# Altium PCB CLP_007.PcbDoc (part 1 of 2)
Units mm, origin at the board's own origin, x right, y up, seen from the top; angles counter-clockwise.
Board outline 145 x 100 mm, 2 copper layers (Top Layer, Bottom Layer); 159 components, 145 nets, 656 pads, 92 vias.
Unrouted connection lines stored in the file: 86.
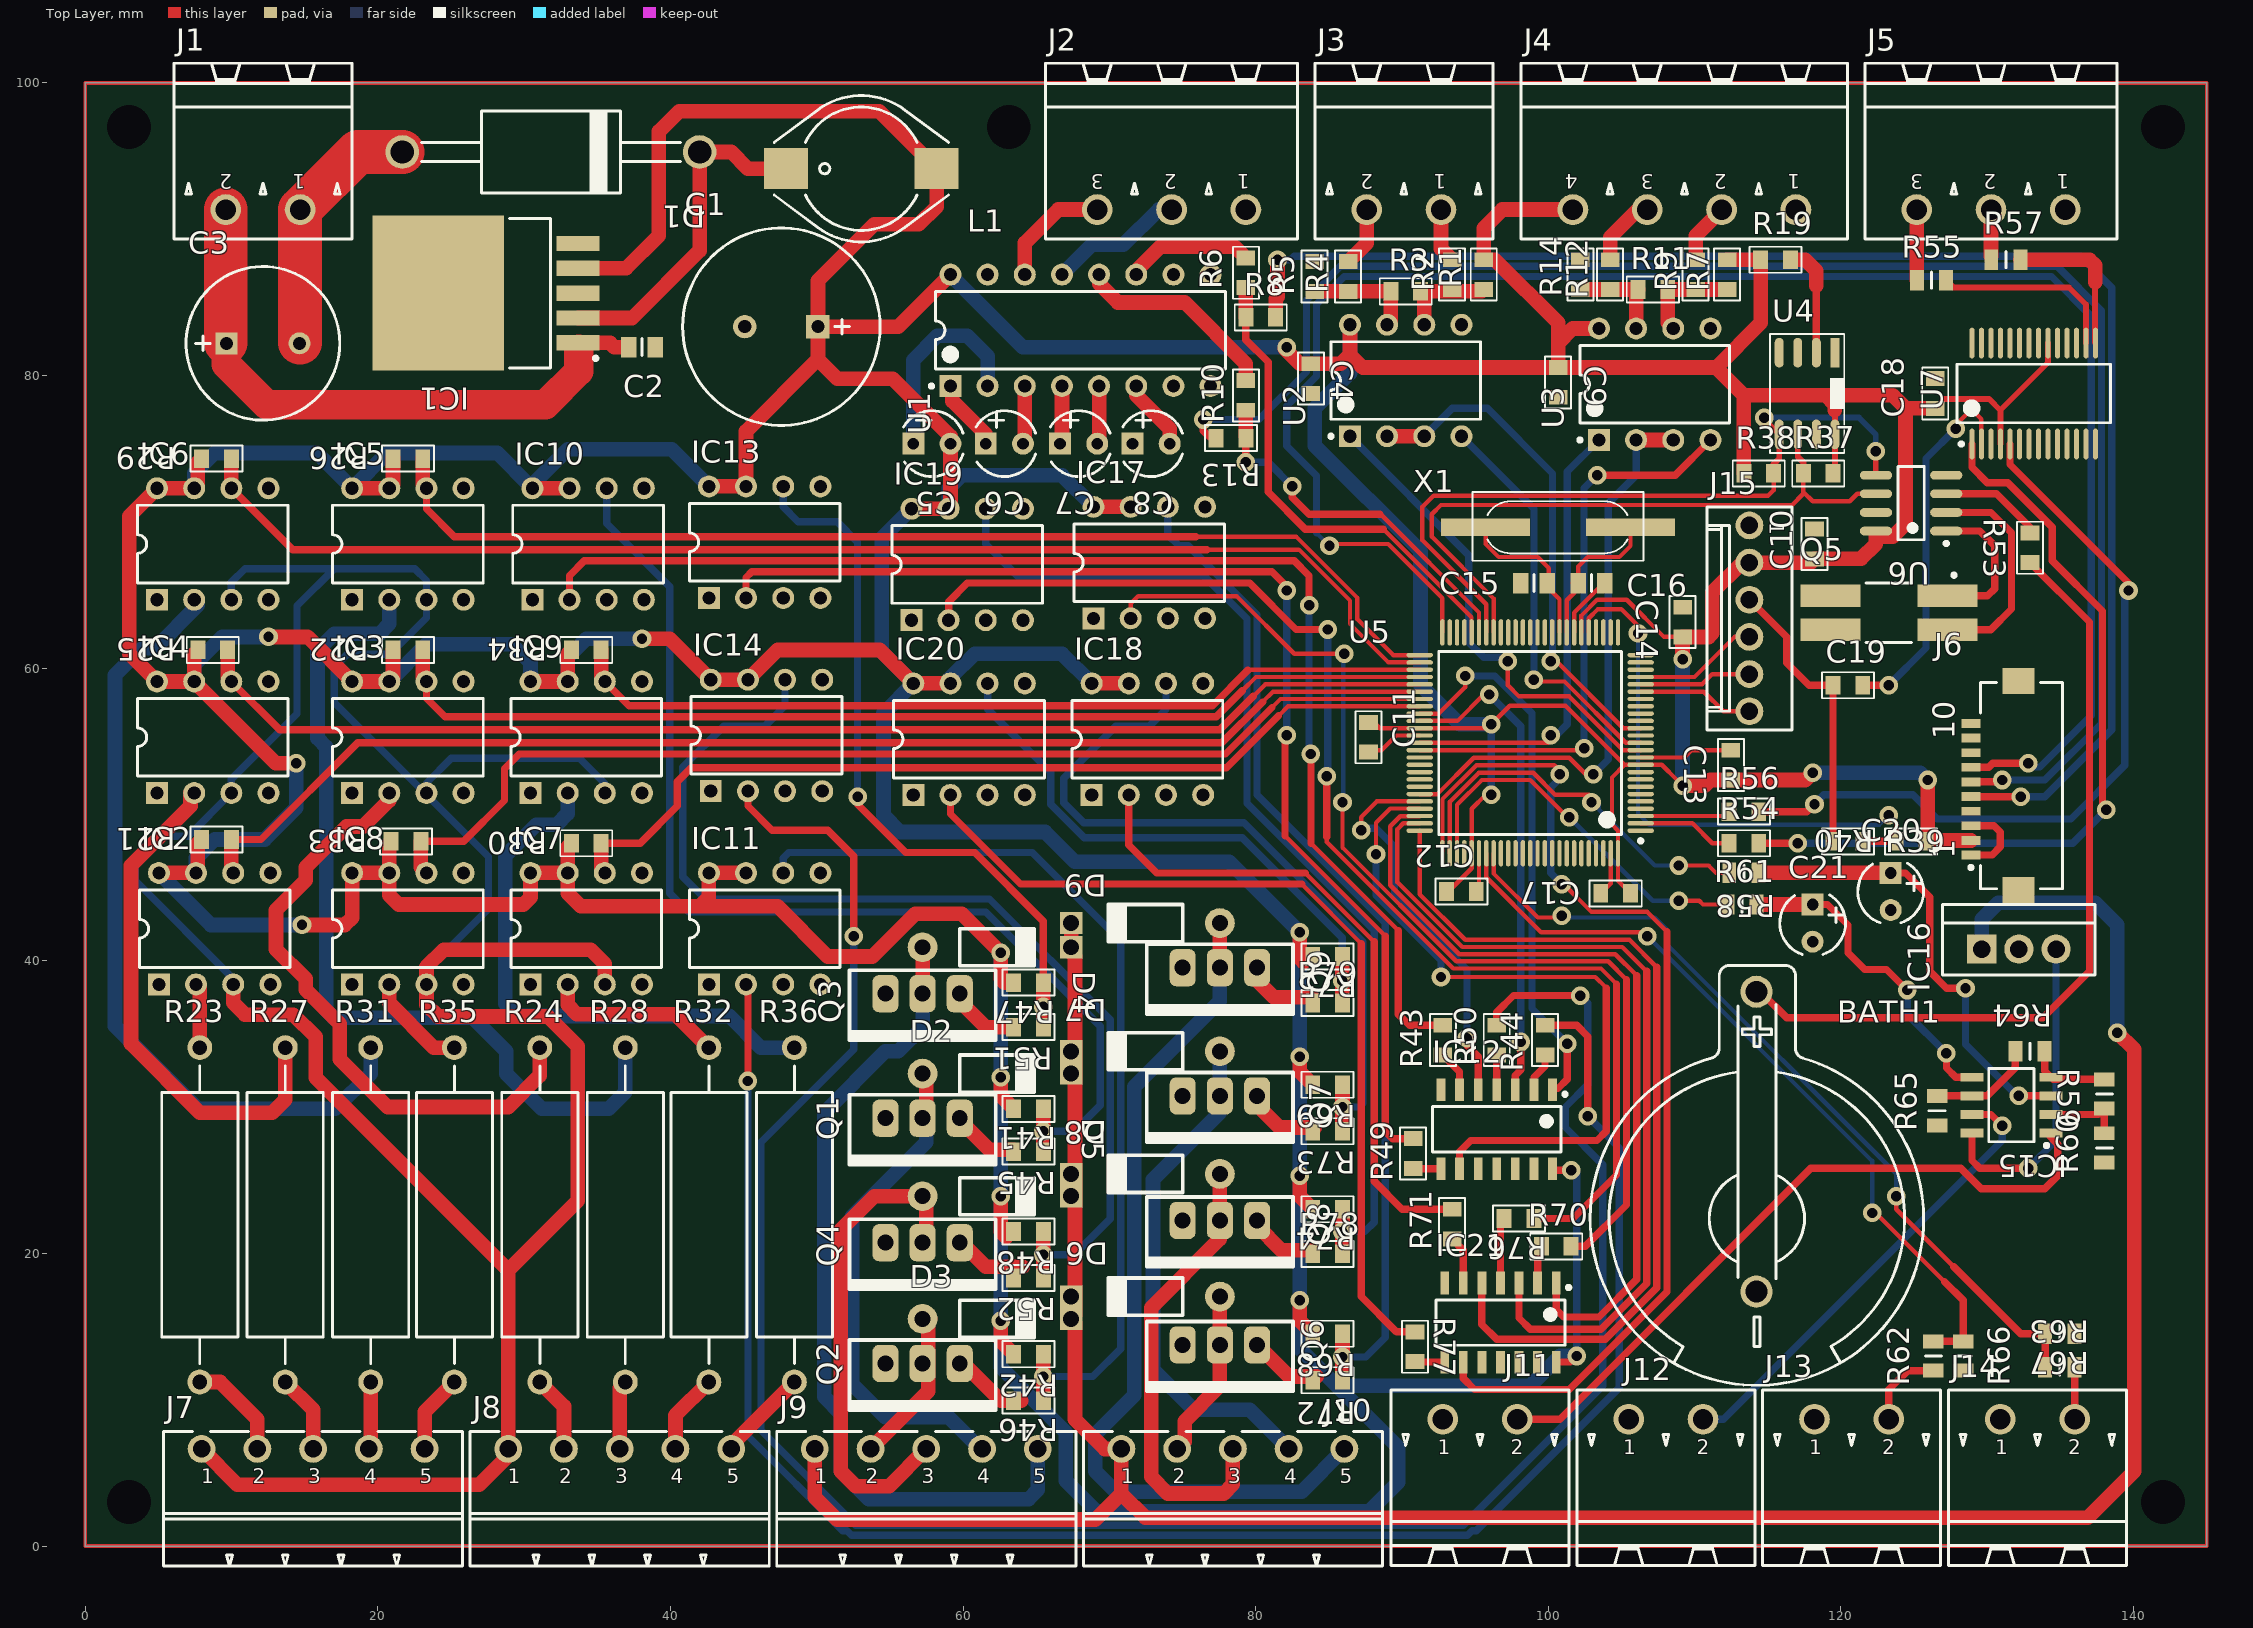
[diagram p0: Top Layer view]
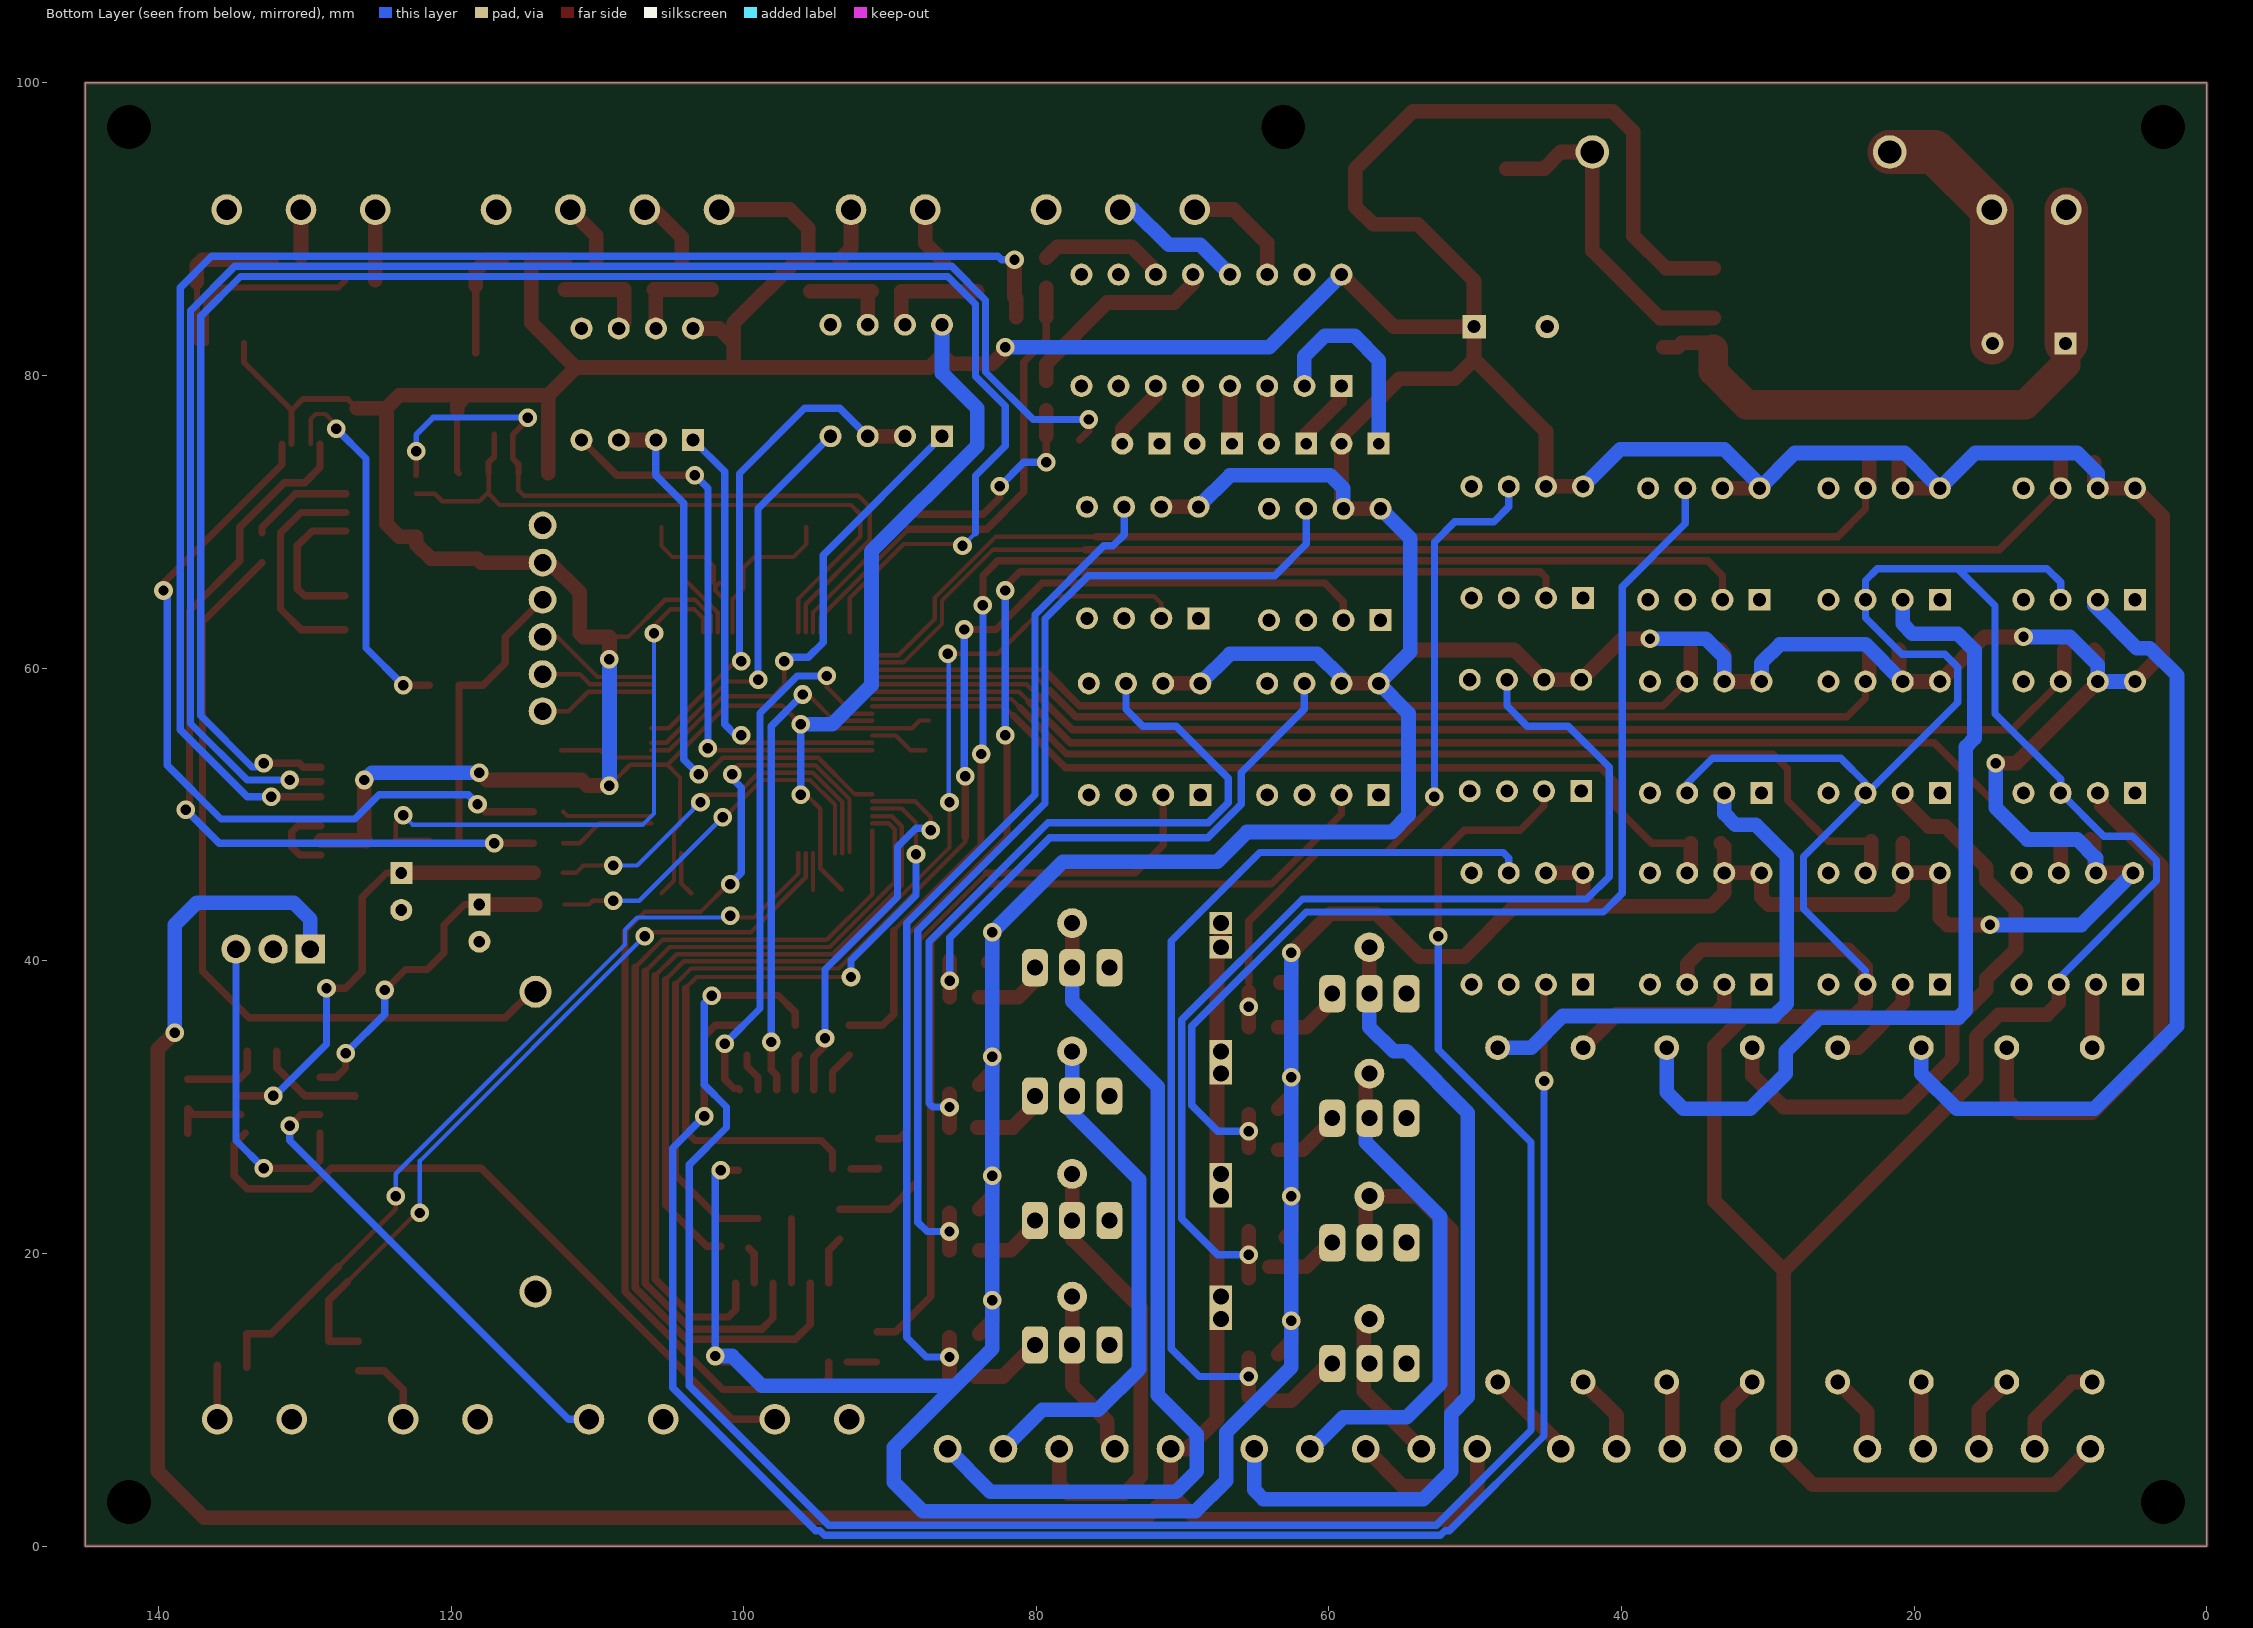
[diagram p1: Bottom Layer view, seen from below]
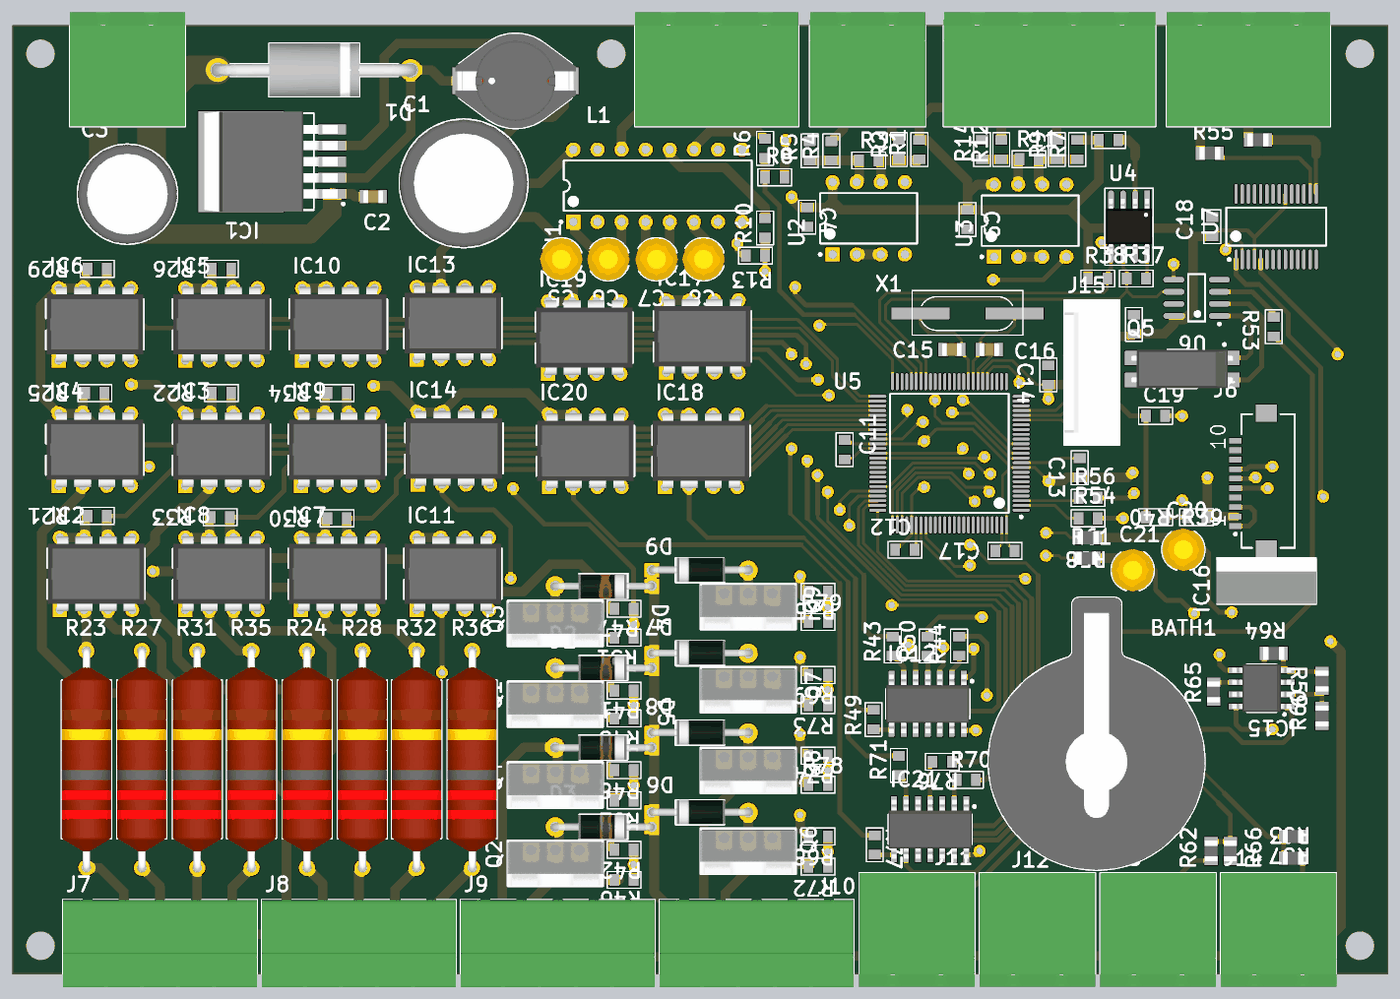
[diagram p3: 3D render of the assembled board from above, using the file's embedded part models]

## Layer stack, top to bottom
Top Layer: signal copper 0.0356
Dielectric: dielectric 0.32, FR-4, Dk 4.8
Bottom Layer: signal copper 0.0356

## Board outline
0,0 145,0 145,100 0,100

## Design rules (kind name [scope] priority, off if disabled: settings)
Clearance [All] p1: gap=0.19
PolygonConnect [All] p1: connectstyle=Relief reliefconductorwidth=0.254 reliefentries=4 polygonreliefangle="90 Angle" airgapwidth=0.254
RoutingVias [All] p1: holewidth=0.711 width=1.27 viastyle="Through Hole" minholewidth=0.711 minwidth=1.27 maxholewidth=0.711 maxwidth=1.27
SilkToSolderMaskClearance SilkscreenOverComponentPads [IsPad] p1: minsilkscreentomaskgap=0.254 clearancetoexposedcopper=TRUE
SolderMaskExpansion [All] p1: expansion=0.102
Width [All] p1: maxlimit=4 minlimit=0.254 preferedwidth=1
27 further rules are at their usual default settings.

## Classes and differential pairs
component class USB_SERIAL: C18 C19 R54 R55 R56 R57 U7
component class RTC_ds1307z: BATH1 C17 Q5 R53 U6
component class Output_dig: D2 D3 D4 D5 IC10 IC11 IC12 IC13 IC14 Q1 Q2 Q3 Q4 R41 R42 R43 R44 R45 R46 R47 R48 R49 R50 R51 R52
component class Output_dig2: D6 D7 D8 D9 IC17 IC18 IC19 IC20 IC21 Q6 Q7 Q8 Q9 R68 R69 R70 R71 R72 R73 R74 R75 R76 R77 R78 R79
component class Microcontrolador: C11 C12 C13 C14 C15 C16 J15 R37 R38 R39 R40 U5 X1
component class Input_dig: IC2 IC3 IC4 IC5 IC6 IC7 IC8 IC9 R21 R22 R23 R24 R25 R26 R27 R28 R29 R30 R31 R32 R33 R34 R35 R36
component class eeprom24c32: C10 R19 U4
component class conn: J1 J2 J3 J4 J5 J6 J7 J8 J9 J10 J11 J12 J13 J14
component class Comu_485: C4 C5 C6 C7 C8 C9 R1 R2 R3 R4 R5 R6 R7 R8 R9 R10 R11 R12 R13 R14 U1 U2 U3
component class analog: C20 C21 IC15 IC16 R58 R59 R60 R61 R62 R63 R64 R65 R66 R67
component class Alimentacao: C1 C2 C3 D1 IC1 L1

## Components (designator, comment, footprint, x,y, rotation, side; value= is the part's Value field where it differs from the comment)
BATH1 "Value" BATH_KEYSTONE_103 114.253,22.385 r270 top
C1 "1000uF" CAPPR500-1350X2200 47.578,83.345 r180 top
C2 "100nF" CAPC2012X135N 38.053,81.948 r180 top
C3 "100uF" CAPPR500-1050X1750 12.145,82.202 r0 top
C4 "100nF" 0805C-TBD 83.773,80.551 r270 top
C5 "1uF" CAPPRB254-450X710 57.865,75.344 r0 top
C6 "1uF" CAPPRB254-450X710 62.818,75.344 r0 top
C7 "1uF" CAPPRB254-450X710 67.898,75.344 r0 top
C8 "1uF" CAPPRB254-450X710 72.851,75.344 r0 top
C9 "100nF" 0805C-TBD 100.664,80.297 r270 top
C10 "100nF" 0805C-TBD 118.19,67.724 r90 top
C11 "100nF" 0805C-TBD 87.71,56.04 r270 top
C12 "100nF" 0805C-TBD 93.298,44.737 r0 top
C13 "100nF" 0805C-TBD 112.475,52.611 r90 top
C14 "100nF" 0805C-TBD 109.173,62.39 r90 top
C15 "22pF" CAPC2012X135N 99.013,65.819 r0 top
C16 "22pF" CAPC2012X135N 102.95,65.819 r180 top
C17 "100nF" 0805C-TBD 105.363,44.61 r180 top
C18 "100nF" 0805C-TBD 126.445,78.011 r90 top
C19 "100nF" 0805C-TBD 121.238,58.834 r180 top
C20 "1uF" CAPPRB254-450X710 123.397,44.737 r270 top
C21 "1uF" CAPPRB254-450X710 118.063,42.578 r270 top
D1 "1N5822" DO-201AD 31.83,95.283 r180 top
D2 "DIODO 1N4007 PF-B1" "DIODO DO41 PF-B1" 67.39,32.291 r270 top
D3 "DIODO 1N4007 PF-B1" "DIODO DO41 PF-B1" 67.39,15.527 r270 top
D4 "DIODO 1N4007 PF-B1" "DIODO DO41 PF-B1" 67.39,40.927 r270 top
D5 "DIODO 1N4007 PF-B1" "DIODO DO41 PF-B1" 67.39,23.909 r270 top
D6 "DIODO 1N4007 PF-B1" "DIODO DO41 PF-B1" 67.39,17.051 r90 top
D7 "DIODO 1N4007 PF-B1" "DIODO DO41 PF-B1" 67.39,33.815 r90 top
D8 "DIODO 1N4007 PF-B1" "DIODO DO41 PF-B1" 67.39,25.433 r90 top
D9 "DIODO 1N4007 PF-B1" "DIODO DO41 PF-B1" 67.39,42.578 r90 top
IC1 "LT1764AEQ-3.3#PBF" TO170P1394X457-6N-R900X1060 27.385,85.631 r180 top
IC2 "HCPL-2601-000E" DIP8-300 8.843,42.197 r90 top
IC3 "HCPL-2601-000E" DIP8-300 22.051,55.278 r90 top
IC4 "HCPL-2601-000E" DIP8-300 8.716,55.278 r90 top
IC5 "HCPL-2601-000E" DIP8-300 22.051,68.486 r90 top
IC6 "HCPL-2601-000E" DIP8-300 8.716,68.486 r90 top
IC7 "HCPL-2601-000E" DIP8-300 34.243,42.197 r90 top
IC8 "HCPL-2601-000E" DIP8-300 22.051,42.197 r90 top
IC9 "HCPL-2601-000E" DIP8-300 34.243,55.278 r90 top
IC10 "HCPL-2601-000E" DIP8-300 34.37,68.486 r90 top
IC11 "HCPL-2601-000E" DIP8-300 46.435,42.197 r90 top
IC12 "SN74LS04D" SOIC127P600X175-14N 96.473,28.481 r270 top
IC13 "HCPL-2601-000E" DIP8-300 46.435,68.613 r90 top
IC14 "HCPL-2601-000E" DIP8-300 46.562,55.405 r90 top
IC15 "LM358AD" SOIC127P600X175-8N 131.652,30.132 r180 top
IC16 "LM7812CT" TO-220-V 132.16,40.8 r0 top
IC17 "HCPL-2601-000E" DIP8-300 72.724,67.216 r90 top
IC18 "HCPL-2601-000E" DIP8-300 72.597,55.151 r90 top
IC19 "HCPL-2601-000E" DIP8-300 60.278,67.089 r90 top
IC20 "HCPL-2601-000E" DIP8-300 60.405,55.151 r90 top
IC21 "SN74LS04D" SOIC127P600X175-14N 96.727,15.273 r270 top
J1 "Family" PHOENIX_1757242 12.145,91.346 r180 top
J2 "Family" PHOENIX_1757255 74.248,91.346 r180 top
J3 "Family" PHOENIX_1757242 90.123,91.346 r180 top
J4 "Family" PHOENIX_1757268 109.3,91.346 r180 top
J5 "Family" PHOENIX_1757255 130.255,91.346 r180 top
J6 "CL586-0541-8" FH12-22(10)SA-1SH 130.509,51.976 r90 top
J7 "Family" PHOENIX_1803303 15.574,6.637 r0 top
J8 "Family" PHOENIX_1803303 36.529,6.637 r0 top
J9 "Family" PHOENIX_1803303 57.484,6.637 r0 top
J10 "Family" PHOENIX_1803303 78.439,6.637 r0 top
J11 "Family" PHOENIX_1757242 95.33,8.669 r0 top
J12 "Family" PHOENIX_1757242 108.03,8.669 r0 top
J13 "Family" PHOENIX_1757242 120.73,8.669 r0 top
J14 "Family" PHOENIX_1757242 133.43,8.669 r0 top
J15 "KK®" MOLEX_22-27-2061 113.745,63.406 r270 top
L1 "100uH" IND_WURTH_WE-PD4_L 53.039,94.14 r0 top
Q1 "TRANSISTOR TIP 122 PF-C2" "TRANSISTOR TO220 PF-C2" 59.77,29.243 r180 top
Q2 "TRANSISTOR TIP 122 PF-C2" "TRANSISTOR TO220 PF-C2" 59.77,12.479 r180 top
Q3 "TRANSISTOR TIP 122 PF-C2" "TRANSISTOR TO220 PF-C2" 59.77,37.752 r180 top
Q4 "TRANSISTOR TIP 122 PF-C2" "TRANSISTOR TO220 PF-C2" 59.77,20.734 r180 top
Q5 "32.768kHz" XTAL_EPSON_MC-406 123.27,63.787 r270 top
Q6 "TRANSISTOR TIP 122 PF-C2" "TRANSISTOR TO220 PF-C2" 80.09,13.749 r180 top
Q7 "TRANSISTOR TIP 122 PF-C2" "TRANSISTOR TO220 PF-C2" 80.09,30.767 r180 top
Q8 "TRANSISTOR TIP 122 PF-C2" "TRANSISTOR TO220 PF-C2" 80.09,22.258 r180 top
Q9 "TRANSISTOR TIP 122 PF-C2" "TRANSISTOR TO220 PF-C2" 80.09,39.53 r180 top
R1 "4K7" 0805R-4K7 95.584,87.663 r270 top
R2 "56" 0805R-56 93.425,86.139 r90 top
R3 "4K7" 0805R-4K7 91.012,85.758 r180 top
R4 "56" 0805R-56 86.313,86.012 r90 top
R5 "4K7" 0805R-4K7 84.027,86.012 r90 top
R6 "56" 0805R-56 79.328,86.266 r90 top
R7 "4K7" 0805R-4K7 112.221,87.663 r270 top
R8 "56" 0805R-56 79.582,83.98 r0 top
R9 "56" 0805R-56 110.062,86.139 r90 top
R10 "56" 0805R-56 79.328,77.884 r90 top
R11 "4K7" 0805R-4K7 107.903,85.885 r180 top
R12 "56" 0805R-56 104.22,86.139 r90 top
R13 "56" 0805R-56 79.074,75.725 r180 top
R14 "4K7" 0805R-4K7 102.188,86.139 r90 top
R19 "0R" 0805R-GENERIC 116.285,87.917 r180 top
R21 "330R" 0805R-330 7.954,48.293 r0 top
R22 "330R" 0805R-330 21.035,61.247 r0 top
R23 "4k7" RES2286-1670X520 7.827,22.639 r90 top
R24 "4k7" RES2286-1670X520 31.068,22.639 r90 top
R25 "330R" 0805R-330 7.7,61.247 r0 top
R26 "330R" 0805R-330 21.035,74.328 r0 top
R27 "4k7" RES2286-1670X520 13.669,22.639 r90 top
R28 "4k7" RES2286-1670X520 36.91,22.639 r90 top
R29 "330R" 0805R-330 7.954,74.328 r0 top
R30 "330R" 0805R-330 33.227,48.039 r0 top
R31 "4k7" RES2286-1670X520 19.511,22.639 r90 top
R32 "4k7" RES2286-1670X520 42.625,22.639 r90 top
R33 "330R" 0805R-330 20.908,48.166 r0 top
R34 "330R" 0805R-330 33.227,61.247 r0 top
R35 "4k7" RES2286-1670X520 25.226,22.639 r90 top
R36 "4k7" RES2286-1670X520 48.467,22.639 r90 top
R37 "1K5" 0805R-1K5 119.206,73.312 r180 top
R38 "1K5" 0805R-1K5 113.618,73.312 r0 top
R39 "1K" 0805R-1K 119.714,48.166 r0 top
R40 "10K" 0805R-10K 125.81,48.166 r180 top
R41 "330R" 0805R-330 63.453,29.878 r0 top
R42 "330R" 0805R-330 63.453,13.114 r0 top
R43 "10K" 0805R-10K 92.79,33.561 r90 top
R44 "10K" 0805R-10K 99.775,33.561 r90 top
R45 "10K" 0805R-10K 65.485,26.957 r180 top
R46 "10K" 0805R-10K 65.485,9.939 r180 top
R47 "330R" 0805R-330 63.453,38.514 r0 top
R48 "330R" 0805R-330 63.453,21.496 r0 top
R49 "10K" 0805R-10K 90.758,25.814 r90 top
R50 "10K" 0805R-10K 96.473,33.561 r90 top
R51 "10K" 0805R-10K 65.485,35.466 r180 top
R52 "10K" 0805R-10K 65.485,18.321 r180 top
R53 "0R" 0805R-GENERIC 132.922,67.47 r90 top
R54 "1K" 0805R-1K 114.126,48.039 r180 top
R55 "22" RESC2012X60N 126.191,86.52 r0 top
R56 "1K" 0805R-1K 114.126,50.198 r180 top
R57 "22" RESC2012X60N 131.271,87.917 r0 top
R58 "4k7" RESC2012X60N 113.364,46.007 r0 top
R59 "1k" RESC2012X60N 138.002,30.894 r90 top
R60 "1k" RESC2012X60N 138.002,27.211 r90 top
R61 "4k7" RESC2012X60N 113.237,43.848 r0 top
R62 "10k" RESC2012X60N 126.318,12.987 r270 top
R63 "10k" RESC2012X60N 134.954,12.225 r0 top
R64 "1k" RESC2012X60N 132.922,33.815 r0 top
R65 "1k" RESC2012X60N 126.572,29.751 r90 top
R66 "10k" RESC2012X60N 128.35,12.987 r90 top
R67 "10k" RESC2012X60N 134.954,14.511 r180 top
R68 "330R" 0805R-330 83.9,14.511 r0 top
R69 "330R" 0805R-330 83.9,31.529 r0 top
R70 "10K" 0805R-10K 99.521,20.48 r0 top
R71 "10K" 0805R-10K 93.425,20.988 r90 top
R72 "10K" 0805R-10K 85.932,11.336 r180 top
R73 "10K" 0805R-10K 85.932,28.354 r180 top
R74 "330R" 0805R-330 83.9,23.02 r0 top
R75 "330R" 0805R-330 83.9,40.292 r0 top
R76 "10K" 0805R-10K 96.981,22.385 r0 top
R77 "10K" 0805R-10K 90.885,12.606 r90 top
R78 "10K" 0805R-10K 85.932,19.972 r180 top
R79 "10K" 0805R-10K 85.932,37.117 r180 top
U1 "MAX232ACPE" PE16A 68.025,83.091 r90 top
U2 "SN65HVD20P" P8 90.25,79.662 r90 top
U3 "SN65HVD20P" P8 107.268,79.408 r90 top
U4 "24C32" SO8 119.587,81.567 r270 top
U5 "ATmega2560-16AU" 100A_N 98.759,54.897 r180 top
U6 "DS1307Z" S8-2_N 124.794,71.28 r180 top
U7 "FT232RL-Reel" SSOP-28_N 133.176,78.773 r90 top
X1 "16MC" XTAL-RU49/4 95.711,69.629 r0 top

## Footprints (in the part's own frame and the unit in brackets; to place one, negate y for a bottom-side part, rotate by r counter-clockwise, add the part's x,y. Pads: shape width x height; smd on the part's side, far side on the other; paste and mask are expansions set on the pad)
100A_N [mm] "Thin QFP, 100-Leads, Body 14x14mm, Pitch 0.5mm, IPC Medium Density"
  oval 1.8x0.3 smd: 1(-7.55,6) 2(-7.55,5.5) 3(-7.55,5) 4(-7.55,4.5) 5(-7.55,4) 6(-7.55,3.5) 7(-7.55,3) 8(-7.55,2.5) 9(-7.55,2) 10(-7.55,1.5) 11(-7.55,1) 12(-7.55,0.5) 13(-7.55,0) 14(-7.55,-0.5) 15(-7.55,-1) 16(-7.55,-1.5) 17(-7.55,-2) 18(-7.55,-2.5) 19(-7.55,-3) 20(-7.55,-3.5) 21(-7.55,-4) 22(-7.55,-4.5) 23(-7.55,-5) 24(-7.55,-5.5) 25(-7.55,-6) 51(7.55,-6) 52(7.55,-5.5) 53(7.55,-5) 54(7.55,-4.5) 55(7.55,-4) 56(7.55,-3.5) 57(7.55,-3) 58(7.55,-2.5) 59(7.55,-2) 60(7.55,-1.5) 61(7.55,-1) 62(7.55,-0.5) 63(7.55,0) 64(7.55,0.5) 65(7.55,1) 66(7.55,1.5) 67(7.55,2) 68(7.55,2.5) 69(7.55,3) 70(7.55,3.5) 71(7.55,4) 72(7.55,4.5) 73(7.55,5) 74(7.55,5.5) 75(7.55,6)
  oval 0.3x1.8 smd: 26(-6,-7.55) 27(-5.5,-7.55) 28(-5,-7.55) 29(-4.5,-7.55) 30(-4,-7.55) 31(-3.5,-7.55) 32(-3,-7.55) 33(-2.5,-7.55) 34(-2,-7.55) 35(-1.5,-7.55) 36(-1,-7.55) 37(-0.5,-7.55) 38(0,-7.55) 39(0.5,-7.55) 40(1,-7.55) 41(1.5,-7.55) 42(2,-7.55) 43(2.5,-7.55) 44(3,-7.55) 45(3.5,-7.55) 46(4,-7.55) 47(4.5,-7.55) 48(5,-7.55) 49(5.5,-7.55) 50(6,-7.55) 76(6,7.55) 77(5.5,7.55) 78(5,7.55) 79(4.5,7.55) 80(4,7.55) 81(3.5,7.55) 82(3,7.55) 83(2.5,7.55) 84(2,7.55) 85(1.5,7.55) 86(1,7.55) 87(0.5,7.55) 88(0,7.55) 89(-0.5,7.55) 90(-1,7.55) 91(-1.5,7.55) 92(-2,7.55) 93(-2.5,7.55) 94(-3,7.55) 95(-3.5,7.55) 96(-4,7.55) 97(-4.5,7.55) 98(-5,7.55) 99(-5.5,7.55) 100(-6,7.55)
  silkscreen extent -7.68,-6.25 6.25,6.82, body extent -7,-7 7,7, height 1.2
0805C-TBD [mil] "CAPACITOR 0805"
  rect 40x50 smd: 1(-10,0) 2(70,0)
  silkscreen extent -40,-35 100,35, body extent -11,-25 70,25, height 26
0805R-1K [mil] "RESISTOR 0805"
  rect 40x50 smd: 1(-10,0) 2(70,0)
  silkscreen extent -40,-35 100,35, body extent -11,-25 70,25, height 27
0805R-1K5 [mil] "RESISTOR 0805"
  rect 40x50 smd: 1(-10,0) 2(70,0)
  silkscreen extent -40,-35 100,35, body extent -11,-25 70,25, height 27
0805R-4K7 [mil] "RESISTOR 0805"
  rect 40x50 smd: 1(-10,0) 2(70,0)
  silkscreen extent -40,-35 100,35, body extent -11,-25 70,25, height 27
0805R-10K [mil] "RESISTOR 0805"
  rect 40x50 smd: 1(0,0) 2(80,0)
  silkscreen extent -30,-35 110,35, body extent -1,-25 80,25, height 27
0805R-56 [mil] "RESISTOR 0805"
  rect 40x50 smd: 1(-10,0) 2(70,0)
  silkscreen extent -40,-35 100,35, body extent -11,-25 70,25, height 27
0805R-330 [mil] "RESISTOR 0805"
  rect 40x50 smd: 1(0,0) 2(80,0)
  silkscreen extent -30,-35 110,35, body extent -1,-25 80,25, height 27
0805R-GENERIC [mil] "RESISTOR 0805"
  rect 40x50 smd: 1(-10,0) 2(70,0)
  silkscreen extent -40,-35 100,35, body extent -11,-25 70,25, height 27
BATH_KEYSTONE_103 [mm] "Battery Holder for 20mm Lithium Coin Cells"
  round 2.2 hole 1.5: 1(-15.5,-0.031) 2(5,-0.031)
  silkscreen extent -17.3,-11.4 11.4,11.4, body extent -17.3,-11.39 11.4,11.39, height 8.5
CAPC2012X135N [mm] "Chip Capacitor, Body 2.0x1.25mm, IPC Medium Density"
  rect 1.05x1.4 smd: 1(-0.9,0) 2(0.9,0)
  silkscreen extent 0,-0.58 0,0.58, body extent -1.05,-0.67 1.05,0.68, height 1.25
CAPPR500-1050X1750 [mm] "Capacitor, Radial, Pin spacing 5.0mm - Body Diameter 10.5mm X Body Height 17.5mm"
  rect 1.5x1.5 hole 0.9: 1(-2.5,0)
  round 1.5 hole 0.9: 2(2.5,0)
  silkscreen extent -5.25,-5.25 5.25,5.25, body extent -5.25,-5.23 5.25,5.23, height 17.5
CAPPR500-1350X2200 [mm] "Capacitor, Radial, Pin spacing 5.0mm - Body Diameter 13.5mm X Body Height 22.0mm"
  rect 1.6x1.6 hole 0.9: 1(-2.5,0)
  round 1.6 hole 0.9: 2(2.5,0)
  silkscreen extent -6.75,-6.75 6.75,6.75, body extent -6.75,-6.75 6.75,6.75, height 22.5
CAPPRB254-450X710 [mm] "Capacitor, Polarized Radial Bead, Pin spacing 2.54mm - Body Diameter 4.5mm X Body Height 7.1mm"
  rect 1.5x1.5 hole 0.8: 1(-1.27,0)
  round 1.5 hole 0.8: 2(1.27,0)
  silkscreen extent -1.93,-2.25 2.13,2.25, body extent -2.25,-2.25 2.25,2.25, height 7.08
"DIODO DO41 PF-B1" [mil]
  rect 60x60 hole 43: 1(0,0)
  round 80 hole 43: 2(0,-400)
  silkscreen extent -50,-300 50,-100, body extent -49,-419 52,11, height 104
DIP8-300 [mm] "DIP 8 Leads, Row Spacing 7.62 mm; Pitch 2.54 mm"
  rect 1.5x1.5 hole 0.9: 1(-3.81,3.81)
  round 1.5 hole 0.9: 2(-3.81,1.27) 3(-3.81,-1.27) 4(-3.81,-3.81) 5(3.81,-3.81) 6(3.81,-1.27) 7(3.81,1.27) 8(3.81,3.81)
  silkscreen extent -2.65,-5.15 2.65,5.15, body extent -3.93,-5.08 3.94,5.08, height 5.33
DO-201AD [mm] "DO-201AD, Diode, Axial; Lead Spacing 20.32mm, Lead Dia. 1.3mm, Body Length 9.5mm, Body Dia. 5.6mm"
  round 2.3 hole 1.6: 1(-10.16,0) 2(10.16,0)
  silkscreen extent -8.85,-2.8 8.85,2.8, body extent -10.81,-2.8 10.81,2.8, height 5.6
FH12-22(10)SA-1SH [mm] "Connector; FH12 Series; 10 Position; 1.0mm Spaced Bottom Eccentric Contact"
  rect 0.6x1.3 smd: 1(-4.75,1.625) 2(-3.75,1.625) 3(-2.75,1.625) 4(-1.75,1.625) 5(-0.75,1.625) 6(0.25,1.625) 7(1.25,1.625) 8(2.25,1.625) 9(3.25,1.625) 10(4.25,1.625)
  rect 1.8x2.2 smd: 11(7.15,-1.625) 12(-7.15,-1.625)
  silkscreen extent -7.05,-4.62 7.05,1.75
IND_WURTH_WE-PD4_L [mm] "SMD Power Choke, Width 10mm Body Lenght 12.7mm Height 5.3mm, WURTH WE-PD 4 Serie Type L"
  rect 3x2.8 smd: 1(-5.15,0) 2(5.15,0)
  silkscreen extent -5.95,-5 5.95,5, body extent -6.35,-4.99 6.35,4.99, height 5
MOLEX_22-27-2061 [mm] "2.54mm (.100\") Pitch KK® Header, Single Row, Vertical, 6 Circuits"
  round 1.9 hole 1.2: 1(-6.35,0) 2(-3.81,0) 3(-1.27,0) 4(1.27,0) 5(3.81,0) 6(6.35,0)
  silkscreen extent -7.62,-2.9 7.62,2.9, body extent -7.62,-2.9 7.62,2.9, height 11.7
P8 [mm] "DIP, 8-Leads, Row Spacing 7.62mm, Pitch 2.54mm, Body 9.6x6.4mm"
  rect 1.5x1.5 hole 0.9: 1(-3.81,3.81)
  round 1.5 hole 0.9: 2(-3.81,1.27) 3(-3.81,-1.27) 4(-3.81,-3.81) 5(3.81,-3.81) 6(3.81,-1.27) 7(3.81,1.27) 8(3.81,3.81)
  silkscreen extent -3.93,-5.1 2.65,5.23, body extent -3.3,-5.07 3.3,5.07, height 5.08
PE16A [mm] "DIP, 16-Leads, Row Spacing 7.62mm, Pitch 2.54mm, Body 19.18x6.99mm"
  rect 1.5x1.5 hole 0.9: 1(-3.81,8.89)
  round 1.5 hole 0.9: 2(-3.81,6.35) 3(-3.81,3.81) 4(-3.81,1.27) 5(-3.81,-1.27) 6(-3.81,-3.81) 7(-3.81,-6.35) 8(-3.81,-8.89) 9(3.81,-8.89) 10(3.81,-6.35) 11(3.81,-3.81) 12(3.81,-1.27) 13(3.81,1.27) 14(3.81,3.81) 15(3.81,6.35) 16(3.81,8.89)
  silkscreen extent -3.93,-9.9 2.65,10.31, body extent -3.3,-9.9 3.3,9.9, height 5.08
PHOENIX_1757242 [mm] "PHOENIX MSTBA Serie, Pitch 5.08mm, 12A, 250V, 2 Positions Header"
  round 2.1 hole 1.4: 1(-2.54,0) 2(2.54,0)
  silkscreen extent -6.08,-10 6.08,2, body extent -6.08,-10 6.08,2, height 8.6
PHOENIX_1757255 [mm] "PHOENIX MSTBA Serie, Pitch 5.08mm, 12A, 250V, 3 Positions Header"
  round 2.1 hole 1.4: 1(-5.08,0) 2(0,0) 3(5.08,0)
  silkscreen extent -8.62,-10 8.62,2, body extent -8.62,-10 8.62,2, height 8.6
PHOENIX_1757268 [mm] "PHOENIX MSTBA Serie, Pitch 5.08mm, 12A, 250V, 4 Positions Header"
  round 2.1 hole 1.4: 1(-7.62,0) 2(-2.54,0) 3(2.54,0) 4(7.62,0)
  silkscreen extent -11.16,-10 11.16,2, body extent -11.16,-10 11.16,2, height 8.6
PHOENIX_1803303 [mm] "PHOENIX MC Serie, Pitch 3.81mm, 8A, 160V, 5 Positions Right Angled Header"
  round 1.9 hole 1.2: 1(-7.62,0) 2(-3.81,0) 3(0,0) 4(3.81,0) 5(7.62,0)
  silkscreen extent -10.22,-8 10.22,1.2, body extent -10.22,-8 10.22,1.3, height 7.25
RES2286-1670X520 [mm] "Resistor, Axial, Pad spacing 22.22 mm - Body Lengh 16.7mm X Body Diameter 5.2mm"
  round 1.7 hole 1: 1(-11.43,0) 2(11.43,0)
  silkscreen extent -10.16,-2.6 10.16,2.6, body extent -11.82,-2.6 11.82,2.6, height 5.2
RESC2012X60N [mm] "Chip Resistor, EIA 0805, Metric 2012, Body 2.0x1.2mm, IPC Medium Density"
  rect 0.95x1.4 smd: 1(-1,0) 2(1,0)
  silkscreen extent 0,-0.55 0,0.55, body extent -1.1,-0.67 1.1,0.68, height 0.6
S8-2_N [mm] "SOIC, 8-Leads, Body 4.9x3.9mm, Pitch 1.27mm, IPC Medium Density"
  oval 2.2x0.6 smd: 1(-2.4,1.905) 2(-2.4,0.635) 3(-2.4,-0.635) 4(-2.4,-1.905) 5(2.4,-1.905) 6(2.4,-0.635) 7(2.4,0.635) 8(2.4,1.905)
  silkscreen extent -2.53,-2.5 0.9,2.88, body extent -2,-2.5 2,2.5, height 1.75
SO8 [mil]
  rect 80x24 smd: 1(0,0)
  oval 80x24 smd: 2(0,-50) 3(0,-100) 4(0,-150) 5(220,-150) 6(220,-100) 7(220,-50) 8(220,0)
  silkscreen extent -50,-175 270,25, body extent -5,-171 222,22, height 57
SOIC127P600X175-8N [mm] "SOIC 8, Pitch 1.27mm - Body 4x5mm, IPC Medium Density"
  rect 1.55x0.6 smd: 1(-2.7,1.905) 2(-2.7,0.635) 3(-2.7,-0.635) 4(-2.7,-1.905) 5(2.7,-1.905) 6(2.7,-0.635) 7(2.7,0.635) 8(2.7,1.905)
  silkscreen extent -2.53,-2.5 1.55,2.88, body extent -3.1,-2.5 3.1,2.5, height 1.75
SOIC127P600X175-14N [mm] "SOIC 14, Pitch 1.27mm - Body 4x8.75mm, IPC Medium Density"
  rect 1.55x0.6 smd: 1(-2.7,3.81) 2(-2.7,2.54) 3(-2.7,1.27) 4(-2.7,0) 5(-2.7,-1.27) 6(-2.7,-2.54) 7(-2.7,-3.81) 8(2.7,-3.81) 9(2.7,-2.54) 10(2.7,-1.27) 11(2.7,0) 12(2.7,1.27) 13(2.7,2.54) 14(2.7,3.81)
  silkscreen extent -2.52,-4.4 1.55,4.79, body extent -3.1,-4.37 3.1,4.38, height 1.75
SSOP-28_N [mm] "SOP, 28-Leads, Body 10.2x5.3mm, Pitch 0.65mm, IPC Medium Density"
  oval 2.1x0.35 smd: 1(-3.45,4.225) 2(-3.45,3.575) 3(-3.45,2.925) 4(-3.45,2.275) 5(-3.45,1.625) 6(-3.45,0.975) 7(-3.45,0.325) 8(-3.45,-0.325) 9(-3.45,-0.975) 10(-3.45,-1.625) 11(-3.45,-2.275) 12(-3.45,-2.925) 13(-3.45,-3.575) 14(-3.45,-4.225) 15(3.45,-4.225) 16(3.45,-3.575) 17(3.45,-2.925) 18(3.45,-2.275) 19(3.45,-1.625) 20(3.45,-0.975) 21(3.45,-0.325) 22(3.45,0.325) 23(3.45,0.975) 24(3.45,1.625) 25(3.45,2.275) 26(3.45,2.925) 27(3.45,3.575) 28(3.45,4.225)
  silkscreen extent -3.57,-5.25 2,5.25, body extent -2.8,-5.25 2.8,5.25, height 2
TO170P1394X457-6N-R900X1060 [mm] "TO, 1.70mm Pitch; 5 Pin, 13.945mm L X 8.89mm W X 4.572mm H body, IPC Medium Density"
  rect 2.95x1.05 smd: 1(-6.3,3.4) 2(-6.3,1.7) 3(-6.3,0) 4(-6.3,-1.7) 5(-6.3,-3.4)
  rect 9x10.6 smd: 6(3.25,0)
  silkscreen extent -7.63,-5.1 -1.6,5.1, body extent -6.93,-5.27 7.11,5.27, height 4.63
TO-220-V [mm] "TO-220 3-Terminal - Vertical Mount"
  rect 2x2 hole 1.2: 1(-2.54,0)
  round 2 hole 1.2: 2(0,0) 3(2.54,0)
  silkscreen extent -5.21,-1.78 5.21,3.05, body extent -5.27,-1.75 5.27,2.95, height 20.5
"TRANSISTOR TO220 PF-C2" [mil]
  rrect50% 70x100 hole 43: 1(0,0) 2(100,0) 3(200,0)
  silkscreen extent -100,-63 300,125, body extent -100,-55 300,125, height 726
XTAL-RU49/4 [mil]
  rect 240x47.24 smd: 1(0,0) 2(390,0)
  silkscreen extent -35,-90 425,95, body extent -78,-90 468,95, height 120
XTAL_EPSON_MC-406 [mm] "EPSON Crystal; 10.41mm L X 4.06mm W X 3.6mm H"
  rect 1.52x4.1 smd: 1(-1.16,4) 2(-1.16,-4) 3(1.16,-4) 4(1.16,4)
  silkscreen extent -2.7,-1.55 2.03,4.58, body extent -2.03,-5.4 2.03,5.41, height 3.6

## Part data
BATH1: library part BATH_KEYSTONE_103, "Battery Holder whit 2 Pin"
C1: library part CAER_1000UF_35V_20%_VISHAY_MAL203850102E3, "Polarised capacitor"
C2: library part CC0805_100NF_50V_10%_X7R, "Non-polarised capacitor"
C3: library part CAER_100UF_63V_20%_500-1050X1750_LESR0R190, "Polarised capacitor"
C4 C9 C10 C11 C12 C13 C14 C17 C18 C19: library part 0805C-100nF-25V-X7R-MUR, "CAPACITOR 0805 CERAMIC"
C5 C6 C7 C8 C20 C21: library part CTEB_1UF_35V_10%_254-450X710, "Polarised capacitor"
C15 C16: library part CC0805_22PF_50V_5%_NP0, "Non-polarised capacitor"
D1: "Schottky Diode"
IC1: "3A, Fast Transient Response, Low Noise, LDO Regulators"
IC2 IC3 IC4 IC5 IC6 IC7 IC8 IC9 IC10 IC11 IC13 IC14 IC17 IC18 IC19 IC20: "Single Optocoupler"
IC12 IC21: "Hex Inverter"
IC15: "Dual Operational Amplifier"
IC16: library part LM7812CT_v, "3-Terminal Regulator 1=IN 2=GND 3=OUT"
J1 J3 J11 J12 J13 J14: library part PHOENIX_1757242, "Connector 2 Male"
J2 J5: library part PHOENIX_1757255, "Connector 3 Male"
J4: library part PHOENIX_1757268, "Connector 4 Male"
J6: "FH12 Series, \"Flip-Lock\" SMT/ZIF FFC/FPC Connector - 1.0mm Spaced Bottom Eccentric Contact"
J7 J8 J9 J10: library part PHOENIX_1803303, "Connector 5 Male"
J15: library part MOLEX_22-27-2061, "Connector 6 Male"
L1: library part IND_3.3UH_20%_WURTH_WE-PD4_74456033, "Inductor With Magnetic core"
Q5: library part "XTAL_32.768KHZ_EPSON_MC-406 32.768K-A3:ROHS", "Crystal 4 pins 1=XTAL Control 2 And 3=NC 4=XTAL"
R1 R3 R5 R7 R11 R14: library part 0805R-4K7, "RESISTOR 0805 1/4 WATT THIN FILM"
R2 R4 R6 R8 R9 R10 R12 R13: library part 0805R-56, "RESISTOR 0805 1/4 WATT THIN FILM"
R19 R53: library part 0805R-0R, "RESISTOR 0805 1 WATT"
R21 R22 R25 R26 R29 R30 R33 R34 R41 R42 R47 R48 R68 R69 R74 R75: library part 0805R-330, "RESISTOR 0805 1/4 WATT THIN FILM"
R23 R24 R27 R28 R31 R32 R35 R36: library part RMF_4K7_5%_3W_250PPM_2286-1670X520, "Resistor - 5%"
R37 R38: library part 0805R-1K5, "RESISTOR 0805 1/4 WATT THIN FILM"
R39 R54 R56: library part 0805R-1K, "RESISTOR 0805 1/4 WATT THIN FILM"
R40 R43 R44 R45 R46 R49 R50 R51 R52 R70 R71 R72 R73 R76 R77 R78 R79: library part 0805R-10K, "RESISTOR 0805 1/4 WATT THIN FILM"
R55 R57: library part R0805_22R_1%_0.125W_100PPM, "Resistor - 1%"
R58 R61: library part R0805_4K7_1%_0.125W_100PPM, "Resistor - 1%"
R59 R60 R64 R65: library part R0805_1K_1%_0.33W_100PPM_VISHAY_CRCW-HP, "Resistor - 1%"
R62 R63 R66 R67: library part R0805_10K_0.1%_0.1W_10PPM, "Resistor - 0.1%"
U1: "+5V Powered, Multi-Channel RS-232 Driver/Receiver"
U2 U3: "Extended Common-mode RS-485 Transceiver, 25 Mbps, 5 V, Half Duplex, -40 to 85 degC, 8-pin PDIP (P), Pb-Free (RoHS)"
U4: "I2C EEPROM 4K X 8"
U5: "8-bit AVR Microcontroller, 4.5-5.5V, 16MHz, 256KB Flash, 4KB EEPROM, 8KB SRAM, 86 GPIO pins, 100-pin TQFP, Industrial Grade (-40°C to 85°C), Pb-Free"
U6: "64 x 8, Serial, I2C Real-Time Clock, 5.0V, 8-Pin SO, 0 to 70 degC"
U7: "USB UART Asynchronous Serial Data Transfer Chip, 28-pin SSOP, Tape and Reel"
X1: library part 16MC-HC49US, "16MHZ CRSYTAL HC49US"

## Free pads (board coordinates)
  round 1.524 hole 3: 0(3,3) 0(3,97) 0(63.119,97) 0(142,3) 0(142,97)

## Via types
v1: diameter 1.27, hole 0.711, Top Layer to Bottom Layer, 92 vias

## Nets (pads, with @x,y where several pads share a name; then routed paths per layer and width w, separated by ;. In a path a pad name is that pad's centre, name@x,y a point inside that pad or via, vN(x,y) a via of type N, cw(c..) or ccw(c..) an arc to the next point about the centre after c; other vN are vias at no path point)
5V: C1.1 C4.1 C5.2 C9.1 C10.1 C11.1 C12.1 C13.1 C14.1 C17.1 C18.1 IC1.4 IC2.7 IC2.8 IC3.7 IC3.8 IC4.7 IC4.8 IC5.7 IC5.8 IC6.7 IC6.8 IC7.7 IC7.8 IC8.7 IC8.8 IC9.7 IC9.8 IC10.7 IC10.8 IC11.7 IC11.8 IC12.14 IC13.7 IC13.8 IC14.7 IC14.8 IC17.7 IC17.8 IC18.7 IC18.8 IC19.7 IC19.8 IC20.7 IC20.8 IC21.14 J4.4 J6.2 J15.2 L1.2 R1.1 R7.1 R19.2 R21.1 R22.1 R25.1 R26.1 R29.1 R30.1 R33.1 R34.1 R37.1 R38.1 R40.1 R41.1 R42.1 R47.1 R48.1 R68.1 R69.1 R74.1 R75.1 U1.16 U2.8 U3.8 U4.8 U5.10 U5.31 U5.61 U5.80 U5.100 U6.8 U7.4 U7.20 | length 873.5
  Top Layer w0.3: C11.1@87.329,56.421 87.964,56.421 88.488,55.897 U5.61@91.209,55.897 95.822,55.897 v1(96.092,56.167) 97.362,57.437 101.172,57.437 105.212,53.397 ; C12.1@93.298,44.864 94.759,46.325 U5.80@94.759,47.347 94.759,50.389 95.711,51.341 v1(96.092,51.341) ; U5.31@102.259,62.447 102.259,63.604 103.331,64.676 105.363,64.676 107.903,62.136 C14.1@109.173,62.136 ; C17.1@105.617,44.61 104.759,45.468 U5.100@104.759,47.347 104.759,48.897 104.347,49.309 104.347,52.532 105.212,53.397 ; 111.078,52.357 108.792,52.357 107.752,53.397 U5.10@106.309,53.397 105.212,53.397
  Top Layer w0.4: R37.1@119.46,73.312 119.587,73.439 U4.8@119.587,75.979 119.587,77.63 ; C18.1@126.445,77.757 127.08,78.392 130.128,78.392 130.901,77.619 U7.4@130.901,75.323 ; 130.901,77.641 134.151,80.891 U7.20@134.151,82.223
  Top Layer w0.5: IC12.14@100.377,25.687 v1(101.553,25.687) ; IC21.14@100.537,12.573 101.52,12.573 v1(101.934,12.987)
  Top Layer w1: IC6.8@4.906,72.296 3.001,70.391 3.001,60.993 IC4.8@4.906,59.088 IC4.7@7.446,59.088 ; IC2.8@5.16,46.007 IC2.7@7.573,46.007 7.7,46.007 7.7,48.039 R21.1@7.954,48.293 ; IC6.8@5.16,72.296 IC6.7@7.446,72.296 7.7,72.296 R29.1@7.7,74.074 ; R25.1@7.7,61.247 7.446,60.993 IC4.7@7.446,59.088 ; v1(12.526,62.136) 15.193,62.136 IC3.8@18.241,59.088 IC3.7@20.781,59.088 21.035,59.342 R22.1@21.035,61.247 ; v1(14.431,53.5) 13.034,53.5 IC4.7@7.446,59.088 ; v1(14.812,42.451) 17.733,42.451 18.241,42.959 IC8.8@18.241,46.007 IC8.7@20.781,46.007 ; IC5.8@18.241,72.296 IC5.7@20.781,72.296 21.035,72.55 R26.1@21.035,74.328 ; R33.1@20.781,48.039 IC8.7@20.781,46.007 ; IC9.8@30.433,59.088 IC9.7@32.973,59.088 32.973,60.993 R34.1@33.227,61.247 ; IC10.8@30.433,72.296 IC10.8@30.56,72.296 IC10.7@32.973,72.296 ; R30.1@33.227,48.039 32.973,47.785 IC7.7@32.973,46.007 ; IC1.4@33.685,87.331 36.959,87.331 39.196,89.568 39.196,96.68 40.593,98.077 54.252,98.077 L1.2@58.189,94.14 58.189,91.543 56.976,90.33 53.928,90.33 50.078,86.48 C1.1@50.078,83.345 ; v1(38.053,62.009) 39.958,62.009 IC14.8@42.752,59.215 IC14.7@45.165,59.215 ; IC13.8@42.625,72.423 IC13.7@45.165,72.423 45.165,76.186 50.078,81.099 ; IC11.7@45.165,46.007 IC11.8@42.625,46.007 42.625,44.356 41.99,43.721 ; IC14.7@45.292,59.215 47.324,61.247 54.309,61.247 IC20.8@56.595,58.961 ; IC19.8@56.468,70.899 IC19.7@59.008,70.899 59.135,71.026 C5.2@59.135,75.344 59.135,75.852 55.198,79.789 51.388,79.789 50.078,81.099 ; IC20.8@56.722,58.961 IC20.7@59.135,58.961 IC20.7@59.262,58.961 ; U1.16@59.135,86.901 55.579,83.345 C1.1@50.078,83.345 ; v1(62.564,15.4) 62.564,14.003 R42.1@63.453,13.114 ; v1(62.564,23.909) 62.564,21.496 R48.1@62.945,21.115 ; v1(62.564,32.037) 62.564,30.767 R41.1@63.453,29.878 ; R47.1@63.326,38.514 62.818,38.514 62.564,38.768 v1(62.564,40.546) 59.897,43.213 56.722,43.213 53.801,40.292 50.753,40.292 47.324,43.721 41.99,43.721 ; IC18.8@68.787,58.961 IC18.7@71.327,58.961 ; IC17.8@68.787,71.026 IC17.8@68.914,71.026 IC17.7@71.327,71.026 ; v1(82.122,81.948) 81.995,81.821 83.011,80.805 C4.1@83.773,80.805 85.805,80.805 86.44,81.44 ; v1(83.011,16.797) 83.011,15.4 R68.1@83.9,14.511 ; v1(83.011,25.306) 83.011,23.909 R74.1@83.9,23.02 ; v1(83.011,33.434) 83.011,32.418 R69.1@83.9,31.529 ; v1(83.011,41.943) 83.011,40.165 83.265,39.911 ; U2.8@86.44,83.472 86.44,81.44 ; J4.4@101.68,91.346 96.854,91.346 95.584,90.076 R1.1@95.584,87.917 96.346,87.917 100.664,83.599 100.664,82.202 ; U3.8@103.458,83.218 101.68,83.218 100.664,82.202 ; v1(109.173,51.976) 110.697,51.976 111.078,52.357 C13.1@112.475,52.357 117.555,52.357 v1(118.063,52.865) ; v1(109.173,60.612) C14.1@109.173,62.136 110.951,62.136 111.205,62.39 111.205,65.184 113.237,67.216 J15.2@113.745,67.216 117.936,67.216 C10.1@118.19,67.47 121.365,67.47 122.381,68.486 122.381,68.994 123.524,68.994 124.413,69.883 124.413,77.757 ; R7.1@112.221,87.917 R19.2@114.507,87.917 114.507,83.599 111.459,80.551 ; R38.1@113.364,73.312 113.364,78.646 ; 119.587,77.63 119.587,78.011 118.952,78.646 ; R40.1@125.81,48.166 125.87,48.226 J6.2@128.884,48.226 ; R40.1@125.937,48.293 v1(125.937,52.357) ; C18.1@126.445,77.757 124.413,77.757 ; IC8.7@20.781,46.007 20.781,44.483 21.416,43.848 29.925,43.848 30.433,44.356 IC7.8@30.433,46.007 IC7.7@32.973,46.007 ; IC7.7@32.973,46.007 32.973,44.61 33.862,43.721 41.99,43.721 ; 50.078,81.099 C1.1@50.078,83.345 ; 86.44,81.44 87.329,80.551 C9.1@100.664,80.551 ; C9.1@100.664,80.551 111.459,80.551 ; C9.1@100.664,80.551 100.664,82.202 ; 111.459,80.551 113.364,78.646 ; 113.364,78.646 118.952,78.646 ; 118.952,78.646 123.524,78.646 124.413,77.757
  Bottom Layer w0.5: v1(96.092,51.341) v1(96.092,56.167) ; v1(101.553,25.687) 101.807,25.687 101.934,25.56 v1(101.934,12.987)
  Bottom Layer w1: IC4.8@4.906,59.088 IC4.7@7.446,59.088 7.446,60.231 9.351,62.136 v1(12.526,62.136) ; IC2.8@5.033,46.007 8.589,42.451 v1(14.812,42.451) ; IC6.7@7.446,72.296 7.446,73.312 8.843,74.709 15.828,74.709 IC5.8@18.241,72.296 20.654,74.709 28.147,74.709 IC10.8@30.56,72.296 30.56,72.55 32.973,74.963 40.085,74.963 IC13.8@42.625,72.423 ; IC2.7@7.573,46.007 7.573,47.023 8.843,48.293 12.272,48.293 14.431,50.452 v1(14.431,53.5) ; IC3.7@20.781,59.088 23.321,61.628 29.163,61.628 30.433,60.358 IC9.8@30.433,59.088 ; IC9.7@32.973,59.088 32.973,60.739 34.243,62.009 v1(38.053,62.009) ; IC19.8@56.468,70.899 54.436,68.867 54.436,61.12 IC20.8@56.595,58.961 54.563,56.929 54.563,49.944 55.706,48.801 65.612,48.801 67.644,46.769 78.185,46.769 v1(83.011,41.943) v1(83.011,33.434) v1(83.011,25.306) v1(83.011,16.797) 83.011,13.495 85.551,10.955 ; IC19.7@59.008,70.899 59.008,72.296 59.897,73.185 66.755,73.185 IC17.8@68.914,71.026 ; IC20.7@59.135,58.961 59.135,59.342 60.786,60.993 66.755,60.993 IC18.8@68.787,58.961 ; U1.16@59.135,86.901 64.088,81.948 v1(82.122,81.948) ; v1(62.564,40.546) v1(62.564,32.037) v1(62.564,23.909) v1(62.564,15.4) 62.564,12.225 67.009,7.78 67.009,4.478 69.117,2.37 87.761,2.37 89.742,4.351 89.742,6.764 85.551,10.955 ; U2.8@86.44,83.472 86.44,80.17 84.027,77.757 84.027,75.217 91.266,67.978 91.266,58.834 93.933,56.167 v1(96.092,56.167) ; v1(101.934,12.987) 100.791,12.987 98.759,10.955 85.551,10.955 ; v1(109.173,51.976) v1(109.173,60.612) ; v1(118.063,52.865) 125.429,52.865 v1(125.937,52.357)
12V: IC15.8 IC16.3 | length 21.7
  Top Layer w0.5: IC15.8@128.952,28.227 128.952,26.355 129.493,25.814 v1(132.795,25.814)
  Bottom Layer w0.5: v1(132.795,25.814) 134.7,27.719 IC16.3@134.7,40.8
24V: C2.2 C3.1 D2.1 D3.1 D4.1 D5.1 D6.1 D7.1 D8.1 D9.1 IC1.1 IC16.1 J1.2 J9.1 J10.1 | length 229.5
  Top Layer w1: IC1.1@33.685,82.231 35.865,82.231 36.148,81.948 C2.2@37.153,81.948 ; J9.1@49.864,6.637 49.864,3.335 51.388,1.811 69.041,1.811 70.819,3.589 ; D9.1@67.39,42.578 67.39,40.546 67.644,40.292 D3.1@67.644,15.781 ; D3.1@67.644,15.273 67.644,8.669 69.676,6.637 J10.1@70.819,6.637 70.819,3.589 ; v1(138.891,35.085) 140.034,33.942 140.034,5.113 136.859,1.938 72.47,1.938 70.819,3.589
  Top Layer w2: C3.1@9.645,82.202 9.645,80.765 12.399,78.011 31.449,78.011 33.735,80.297 IC1.1@33.735,81.821
  Top Layer w3: C3.1@9.605,82.242 J1.2@9.605,91.346
  Bottom Layer w1: IC16.1@129.62,40.8 129.62,42.832 130.763,43.975 137.367,43.975 138.891,42.451 v1(138.891,35.085)
GND: BATH1.2 C1.2 C2.1 C3.2 C4.2 C8.1 C9.2 C10.2 C11.2 C12.2 C13.2 C14.2 C15.1 C16.1 C17.2 C18.2 C20.2 C21.2 D1.2 IC1.3 IC1.5 IC2.5 IC3.5 IC4.5 IC5.5 IC6.5 IC7.5 IC8.5 IC9.5 IC10.3 IC10.5 IC11.3 IC11.5 IC12.7 IC13.3 IC13.5 IC14.3 IC14.5 IC16.2 IC17.3 IC17.5 IC18.3 IC18.5 IC19.3 IC19.5 IC20.3 IC20.5 IC21.7 J1.1 J2.1 J4.1 J5.1 J6.9 J6.10 J6.11 J6.12 J11.1 J12.1 J13.1 J14.1 J15.1 Q1.3 Q2.3 Q3.3 Q4.3 Q6.3 Q7.3 Q8.3 Q9.3 R5.2 R14.2 R60.1 R65.1 R66.1 R67.1 U1.15 U2.5 U3.5 U4.1 U4.3 U4.4 U4.7 U5.11 U5.32 U5.62 U5.81 U5.99 U6.4 U7.7 U7.18 U7.21 U7.25 U7.26 | length 37.9
  Top Layer w0.3: C11.2@87.583,54.389 88.599,54.389 89.607,55.397 U5.62@91.209,55.397 ; C12.2@95.259,44.864 U5.81@95.259,47.347 ; U5.32@101.759,62.447 101.759,63.797 103.781,65.819 C16.1@103.85,65.819 ; C17.2@103.585,44.61 104.259,45.284 U5.99@104.259,47.347 ; U5.11@106.309,53.897 109.29,53.897 109.782,54.389 C13.2@112.475,54.389
  Top Layer w3: C3.2@14.685,82.242 J1.1@14.685,91.346 18.622,95.283 D1.2@21.67,95.283
GND_2: IC2.3 IC3.3 IC4.3 IC5.3 IC6.3 IC7.3 IC8.3 IC9.3 J7.1 J8.1 | length 216.9
  Top Layer w1: J7.1@7.954,6.637 10.4,4.191 26.924,4.191 28.909,6.176 J8.1@28.909,6.637 28.909,18.843 ; IC2.3@10.113,38.387 10.113,37.131 10.922,36.322 14.224,36.322 15.748,34.798 15.748,32.004 28.909,18.843 ; IC7.3@35.513,38.387 35.513,39.798 34.544,40.767 24.511,40.767 23.321,39.577 IC8.3@23.321,38.387 23.321,37.004 24.13,36.195 31.623,36.195 33.655,34.163 33.655,23.589 28.909,18.843
  Bottom Layer w0.5: IC6.3@9.986,64.676 9.986,65.866 10.922,66.802 17.018,66.802 ; IC2.3@10.113,38.387 10.113,38.782 3.429,45.466 3.429,46.863 5.08,48.514 7.032,48.514 IC4.3@9.986,51.468 9.986,52.404 14.478,56.896 14.478,64.262 17.018,66.802 ; IC8.3@23.321,38.387 23.321,39.323 27.559,43.561 27.559,47.117 23.321,51.355 IC3.3@23.321,51.468 ; IC9.3@35.513,51.468 35.513,52.117 33.782,53.848 25.019,53.848 23.321,52.15 IC3.3@23.321,51.468 ; 17.018,66.802 22.512,66.802 23.321,65.993 IC5.3@23.321,64.676 23.321,63.453 20.828,60.96 17.907,60.96 17.018,60.071 17.018,57.658 23.208,51.468 IC3.3@23.321,51.468